# EAGLE board source_selector_v3 (EAGLE 8.4.3)
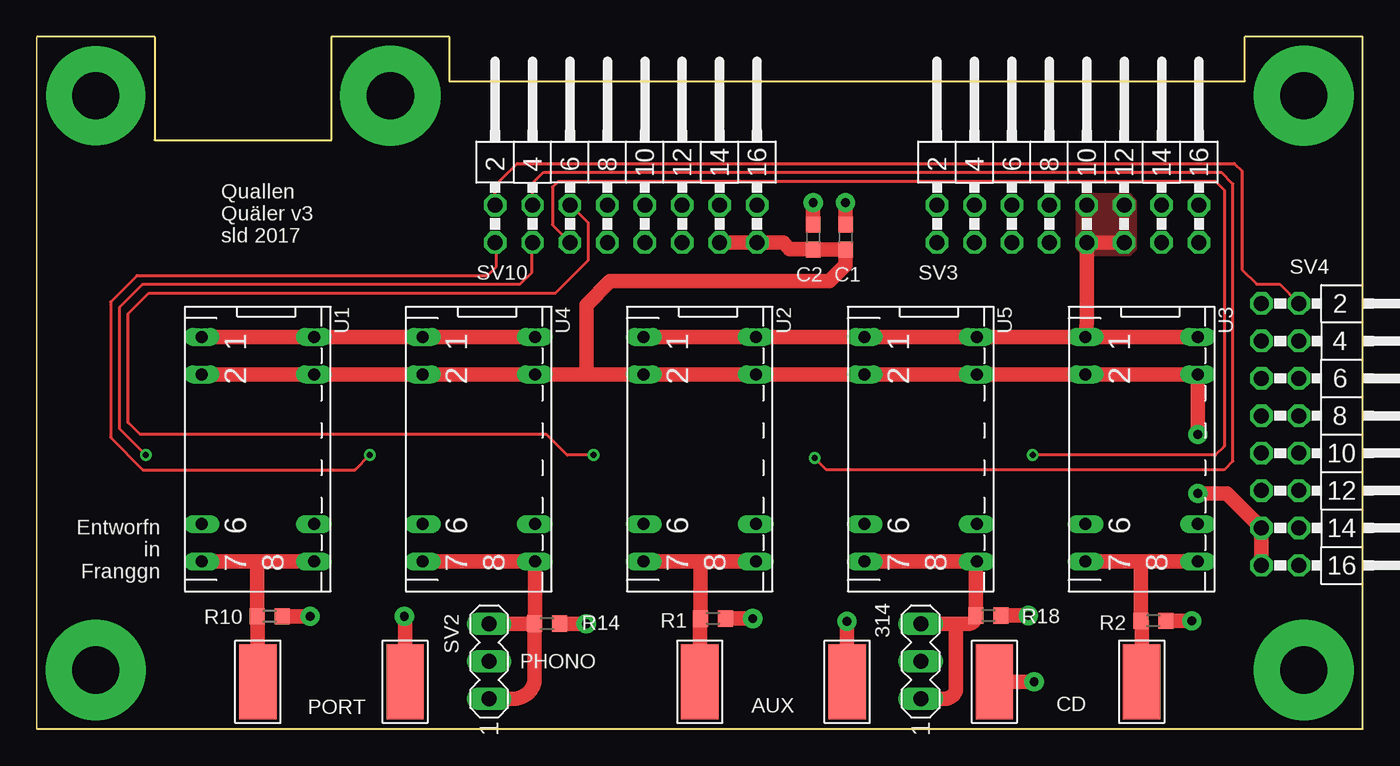
[diagram p0: board, top side]
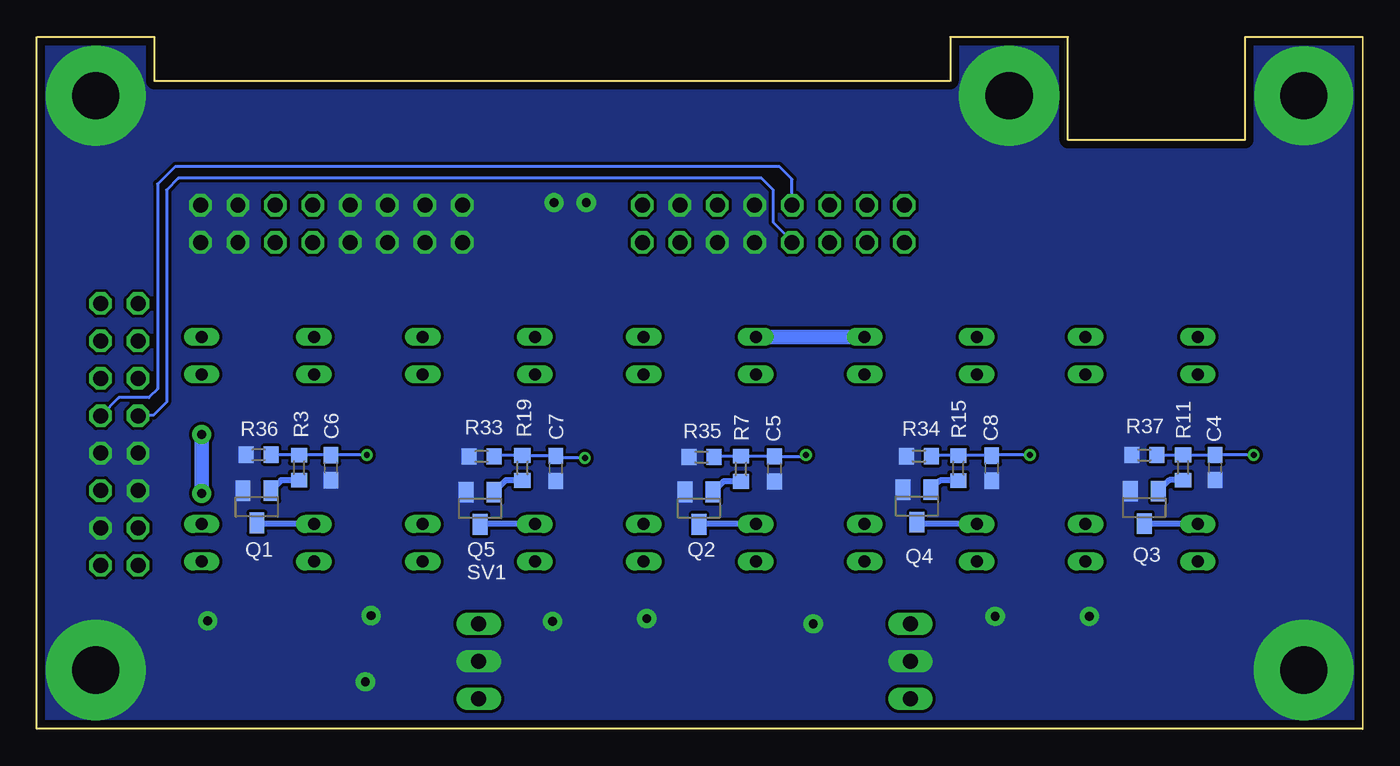
[diagram p1: board, bottom side, seen from below]

Size 90 x 47 mm. Coordinates in mm from the lower left corner, seen from the top.
Outline: 0,0 90,0 90,47 82,47 82,44 28,44 28,47 20,47 20,40 8,40 8,47 0,47 0,0
Copper layers (1*16): Top 0.035mm / dielectric 1.6mm / Bottom 0.035mm
Design rules "Elecrow_2-layer_PCB_eagle_rule": minimum track width 6mil, minimum drill 12mil, track to track 6mil, track to pad 8mil, pad to pad 12mil, via to via 12mil, smd to smd 0mil, copper to edge 20mil, drill to drill 10mil, minimum pad ring 6mil, minimum via ring 6mil, stop-mask expansion 0mil, vias tented up to drill 100mil, thermal gap 10mil
Net classes: 0 default: clearance 0.205 mm

## Footprints (pad centres in the part's own frame; a part is rotated, then mirrored left to right if it is on the bottom)
C0603 = smd 1.1 x 1: 1 -0.85,0; 2 0.85,0
5-2,5 = smd 2.54 x 5.08: 1 0,0
SOT23 = smd 1 x 1.4: 1 -0.95,-1.1; 2 0.95,-1.1; 3 0,1.1
R0603 = smd 1 x 1.1: 1 -0.85,0; 2 0.85,0
MA03-1 = drill 1.016 long: 1 -2.54,0; 2 0,0; 3 2.54,0
MA08-2W = drill 1.016 octagon: 1 -8.89,-1.27; 2 -8.89,1.27; 3 -6.35,-1.27; 4 -6.35,1.27; 5 -3.81,-1.27; 6 -3.81,1.27; 7 -1.27,-1.27; 8 -1.27,1.27; 9 1.27,-1.27; 10 1.27,1.27; 11 3.81,-1.27; 12 3.81,1.27; 13 6.35,-1.27; 14 6.35,1.27; 15 8.89,-1.27; 16 8.89,1.27
DP-07 = drill 0.813 long: 1 -7.62,-3.81; 2 -5.08,-3.81; 6 5.08,-3.81; 7 7.62,-3.81; 8 7.62,3.81; 9 5.08,3.81; 13 -5.08,3.81; 14 -7.62,3.81

## Placement (x,y rotation side)
C1  10n  [C0603]  54.9,33.4 90 top
C2  100n  [C0603]  52.7,33.4 90 top
C4  100n  [C0603]  10.03,17.75 270 bottom
C5  100n  [C0603]  39.93,17.67 270 bottom
C6  100n  [C0603]  70.03,17.74 270 bottom
C7  100n  [C0603]  54.78,17.69 270 bottom
C8  100n  [C0603]  25.18,17.71 270 bottom
PAD1  WIREPADSMD5-2,5  [5-2,5]  15,3.2 0 top
PAD2  WIREPADSMD5-2,5  [5-2,5]  25,3.2 0 top
PAD3  WIREPADSMD5-2,5  [5-2,5]  45,3.2 0 top
PAD4  WIREPADSMD5-2,5  [5-2,5]  55,3.2 0 top
PAD5  WIREPADSMD5-2,5  [5-2,5]  75,3.2 0 top
PAD6  WIREPADSMD5-2,5  [5-2,5]  65,3.2 0 top
Q1  BC847CSMD  [SOT23]  75.07,15.09 180 bottom
Q2  BC847CSMD  [SOT23]  45.05,14.99 180 bottom
Q3  BC847CSMD  [SOT23]  14.83,15.04 180 bottom
Q4  BC847CSMD  [SOT23]  30.26,15.14 180 bottom
Q5  BC847CSMD  [SOT23]  59.9,14.99 180 bottom
R1  1M  [R0603]  45.9,7.5 180 top
R2  1M  [R0603]  75.8,7.35 180 top
R3  10k  [R0603]  72.2,17.74 90 bottom
R7  10k  [R0603]  42.2,17.67 90 bottom
R10  1M  [R0603]  15.81,7.65 180 top
R11  10k  [R0603]  12.19,17.75 90 bottom
R14  1M  [R0603]  34.64,7.15 180 top
R15  10k  [R0603]  27.45,17.71 90 bottom
R18  1M  [R0603]  64.6,7.7 180 top
R19  10k  [R0603]  57.04,17.73 90 bottom
R33  2k2  [R0603]  59.81,18.52 180 bottom
R34  2k2  [R0603]  30.12,18.53 180 bottom
R35  2k2  [R0603]  44.88,18.47 180 bottom
R36  2k2  [R0603]  74.94,18.62 180 bottom
R37  2k2  [R0603]  14.82,18.6 180 bottom
SV1  [MA03-1]  60,4.6 90 top
SV2  [MA03-1]  30.7,4.6 90 top
SV3  [MA08-2W]  70,34.3 0 top
SV4  [MA08-2W]  84.4,20 270 top
SV10  [MA08-2W]  40,34.3 0 top
U1  DIP7212-D5V  [DP-07]  15,19 270 top
U2  DIP7212-D5V  [DP-07]  45,19 270 top
U3  DIP7212-D5V  [DP-07]  75,19 270 top
U4  DIP7212-D5V  [DP-07]  30,19 270 top
U5  DIP7212-D5V  [DP-07]  60,19 270 top

## Library data of the parts
C1 C2 C4-C8 R1-R3 R7 R10 R11 R14 R15 R18 R19 R33-R37 = rcl
PAD1-PAD6 = wirepad
Q1-Q5 = transistor-npn
SV1-SV4 SV10 = con-lstb; OC_FARNELL: unknown; OC_NEWARK: unknown
U1-U5 = meder

## Nets
+5V: C1.1 C2.1 SV4.13 SV4.15 SV10.13 SV10.15 U1.2 U1.13 U2.2 U2.13 U3.2 U3.13 U4.2 U4.13 U5.2 U5.13
AGND: C1.2 C2.2 C4.2 C5.2 C6.2 C7.2 C8.2 PAD2.1 PAD4.1 PAD6.1 Q1.2 Q2.2 Q3.2 Q4.2 Q5.2 R1.1 R2.1 R10.1 R14.1 R18.1 R33.2 R34.2 R35.2 R36.2 R37.2 SV1.2 SV2.2 SV3.1 SV3.2 SV3.3 SV3.4 SV3.5 SV3.6 SV3.7 SV3.8 SV3.13 SV3.14 SV3.15 SV3.16 SV4.9 SV4.10 SV4.11 SV4.14 SV10.9 SV10.10 SV10.11 SV10.14
AMP_OUT: SV4.8 SV10.8
AUX_IN: C5.1 R7.2 R35.1 SV10.6
BYPASS_IN: SV4.2 SV10.2
CD_IN: C6.1 R3.2 R36.1 SV10.5
DAC_IN: C7.1 R19.2 R33.1 SV10.4
HEAD_OUT: SV4.7 SV10.7
N$1: PAD5.1 R2.2 U3.7 U3.8
N$3: Q1.1 R3.1
N$4: Q1.3 U3.6
N$5: PAD3.1 R1.2 U2.7 U2.8
N$7: Q2.1 R7.1
N$8: Q2.3 U2.6
N$9: PAD1.1 R10.2 U1.7 U1.8
N$11: Q3.1 R11.1
N$12: Q3.3 U1.6
N$13: R14.2 SV2.1 SV2.3 U4.7 U4.8
N$15: Q4.1 R15.1
N$16: Q4.3 U4.6
N$17: R18.2 SV1.1 SV1.3 U5.7 U5.8
N$19: Q5.1 R19.1
N$20: Q5.3 U5.6
PHONO_IN: C8.1 R15.2 R34.1 SV10.1
PORTABLE_IN: C4.1 R11.2 R37.1 SV10.3
SUM: SV3.9 SV3.10 SV3.11 SV3.12 U1.1 U1.14 U2.1 U2.14 U3.1 U3.14 U4.1 U4.14 U5.1 U5.14

## Tracks (layer width: path | path; a pad name or v marks a point on that pad's centre or on a via)
+5V  (via drill 0.6 pad 1.3)
  Top 1: U1.2 U1.13 U4.2 U4.13 37.2,24.08 | 37.2,24.08 U2.2 U2.13 U5.2 U5.13 U3.2 U3.13 v78.8,20 | SV10.13 SV10.15 50.67,33.03 51.1,32.6 52.65,32.6 C2.1 C1.1 54.9,31.5 53.8,30.4 38.9,30.4 37.3,28.8 37.3,24.18 37.2,24.08 | v78.8,16 80.78,16 SV4.13 SV4.15
  Bottom 1: v78.8,16 v78.8,20
AGND  (via drill 0.6 pad 1.3, 3.2 pad 6.7, 3.2 pad 6.8)
  Top 1: R1.1 v48.6,7.5 | R2.1 v78.4,7.35 | R10.1 v18.55,7.65 | R14.1 v37.3,7.15 | C2.2 v52.7,35.75 | C1.2 v54.9,35.75 | PAD2.1 25,7.6 arc90 v24.95,7.65 | PAD4.1 v55,7.3 | PAD6.1 v67.7,3.2 | R18.1 v67.3,7.7
  other vias: 4,43 86,43 86,4 4,4 24,43
  pour Bottom (no thermals): 0,0 0,47 8,47 8,40 20,40 20,47 28,47 28,44 82,44 82,47 89,47 90,47 90,0
AMP_OUT
  Bottom 0.2: SV10.8 38.73,37.33 39.6,38.2 80.6,38.2 81.8,37 81.8,23.1 82.4,22.5 84.44,22.5 SV4.8
AUX_IN  (via drill 0.4 pad 0.8)
  Top 0.2: v37.8,18.6 36,18.6 34.6,20 7,20 6.2,20.8 6.2,28.2 7.6,29.6 35.2,29.6 37.4,31.8 37.4,34.4 36.23,35.57 SV10.6
  Bottom 0.2: R35.1 43.98,18.52 R7.2 C5.1 37.88,18.52 v37.8,18.6
BYPASS_IN
  Top 0.2: SV10.2 31.11,36.91 32.6,38.4 81.3,38.4 81.8,37.9 81.8,31.2 82.8,30.2 84.36,30.2 SV4.2
CD_IN  (via drill 0.4 pad 0.8)
  Top 0.2: v67.6,18.6 80,18.6 80.6,19.2 80.6,36.6 80,37.2 35.4,37.2 35,36.8 35,34.22 SV10.5
  Bottom 0.2: R36.1 74.06,18.59 R3.2 C6.1 v67.6,18.6
DAC_IN  (via drill 0.4 pad 0.8)
  Top 0.2: v52.8,18.4 53.6,17.6 80.6,17.6 81.2,18.2 81.2,37 80.4,37.8 34.4,37.8 33.65,37.05 SV10.4
  Bottom 0.2: R33.1 58.89,18.58 R19.2 57.01,18.54 C7.1 54.63,18.4 v52.8,18.4
HEAD_OUT
  Bottom 0.2: SV10.7 38.73,33.13 40,34.4 40,36.6 40.8,37.4 80.4,37.4 81.2,36.6 81.2,22.2 82.1,21.3 83.1,21.3 SV4.7
N$1
  Top 1: U3.7 75,11.38 | 75,11.38 U3.8 | PAD5.1 75,7.3 R2.2 74.95,11.33 75,11.38
N$3
  Bottom 0.4: R3.1 73.42,16.89 Q1.1
N$4
  Bottom 0.4: U3.6 74.99,13.92 Q1.3
N$5
  Top 1: U2.7 45,11.38 | 45,11.38 U2.8 | PAD3.1 45,7.45 R1.2 45.05,11.33 45,11.38
N$7
  Bottom 0.4: R7.1 43.38,16.82 Q2.1
N$8
  Bottom 0.4: U2.6 45.03,13.92 Q2.3
N$9
  Top 1: U1.7 15.2,11.38 | 15.2,11.38 U1.8 | PAD1.1 15,7.61 R10.2 14.96,11.14 15.2,11.38
N$11
  Bottom 0.4: R11.1 13.12,16.9 Q3.1
N$12
  Bottom 0.4: U1.6 14.81,13.92 Q3.3
N$13
  Top 1: SV2.3 R14.2 arc90 33.81,7.17 33.81,7.7 | 33.81,7.7 U4.8 U4.7 | SV2.1 32.36,2.06 arc90 33.8,3.5 33.8,7.69 arc-90 33.81,7.7
N$15
  Bottom 0.4: R15.1 28.68,16.86 Q4.1
N$16
  Bottom 0.4: U4.6 30.14,13.92 Q4.3
N$17
  Top 1: SV1.1 61.66,2.06 arc90 62.4,2.8 62.4,6.94 arc-90 62.6,7.14 | SV1.3 62.6,7.14 | 62.6,7.14 63.19,7.14 arc90 R18.2 63.75,11.32 arc-90 U5.8 U5.7
N$19
  Bottom 0.4: R19.1 58.17,16.88 Q5.1
N$20
  Bottom 0.4: U5.6 59.88,13.92 Q5.3
PHONO_IN  (via drill 0.4 pad 0.8)
  Top 0.2: v22.6,18.6 21.6,17.6 7.2,17.6 5,19.8 5,29 6.8,30.8 30.6,30.8 31.2,31.4 31.2,32.94 SV10.1
  Bottom 0.2: R34.1 29.24,18.56 R15.2 C8.1 25.14,18.6 v22.6,18.6
PORTABLE_IN  (via drill 0.4 pad 0.8)
  Top 0.2: v7.4,18.6 5.6,20.4 5.6,28.6 7.2,30.2 32.8,30.2 33.6,31 33.6,32.98 SV10.3
  Bottom 0.2: R37.1 R11.2 C4.1 v7.4,18.6
SUM
  Top 1: U1.1 U1.14 U4.1 U4.14 | U2.1 U2.14 U5.1 U5.14 U3.1 | U3.1 U3.14 | U3.1 71.27,27.62 SV3.9 SV3.11
  Bottom 1: U4.14 U2.1
  pour Top (no thermals): 74.6,35.8 74.2,36.3 71,36.3 70.6,35.9 70.6,32.7 71,32.2 74.2,32.2 74.6,32.6

## Text on the board
tNames: Quallen / Quäler v3 / sld 2017 | Entworfn / in / Franggn | 314 | PHONO | PORT | AUX | CD